# EAGLE board tsal (EAGLE 9.6.1)
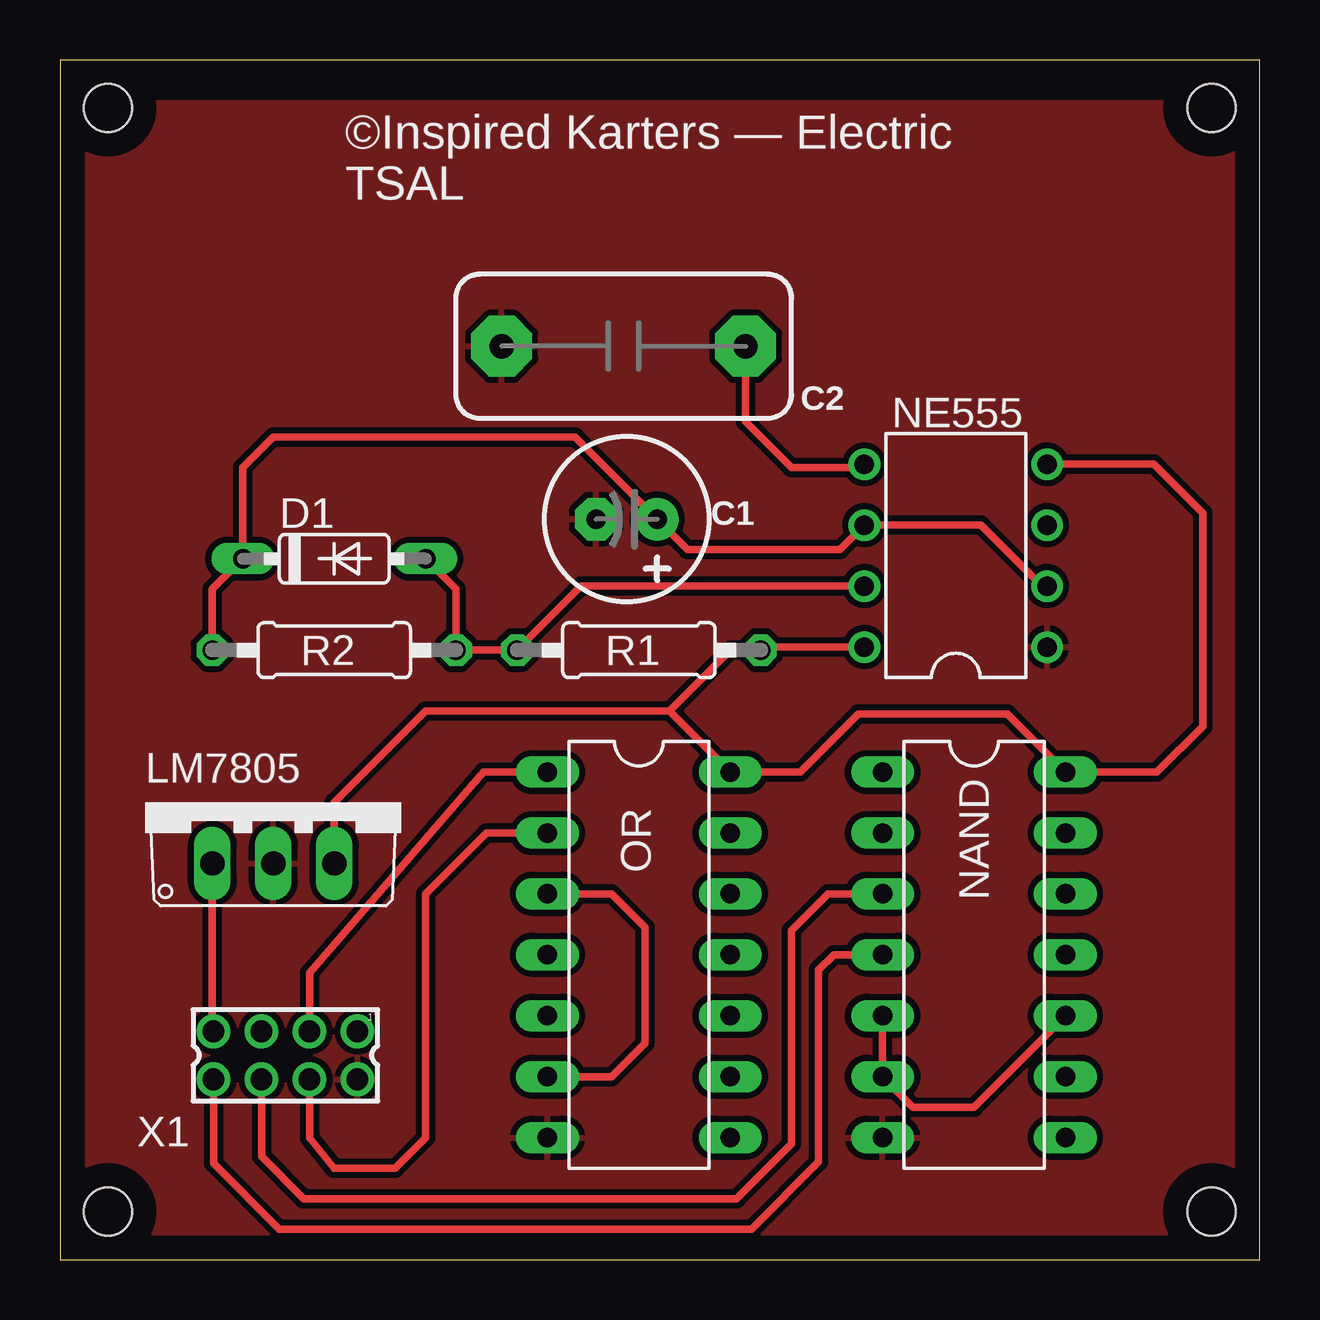
[diagram p0: board, top side]
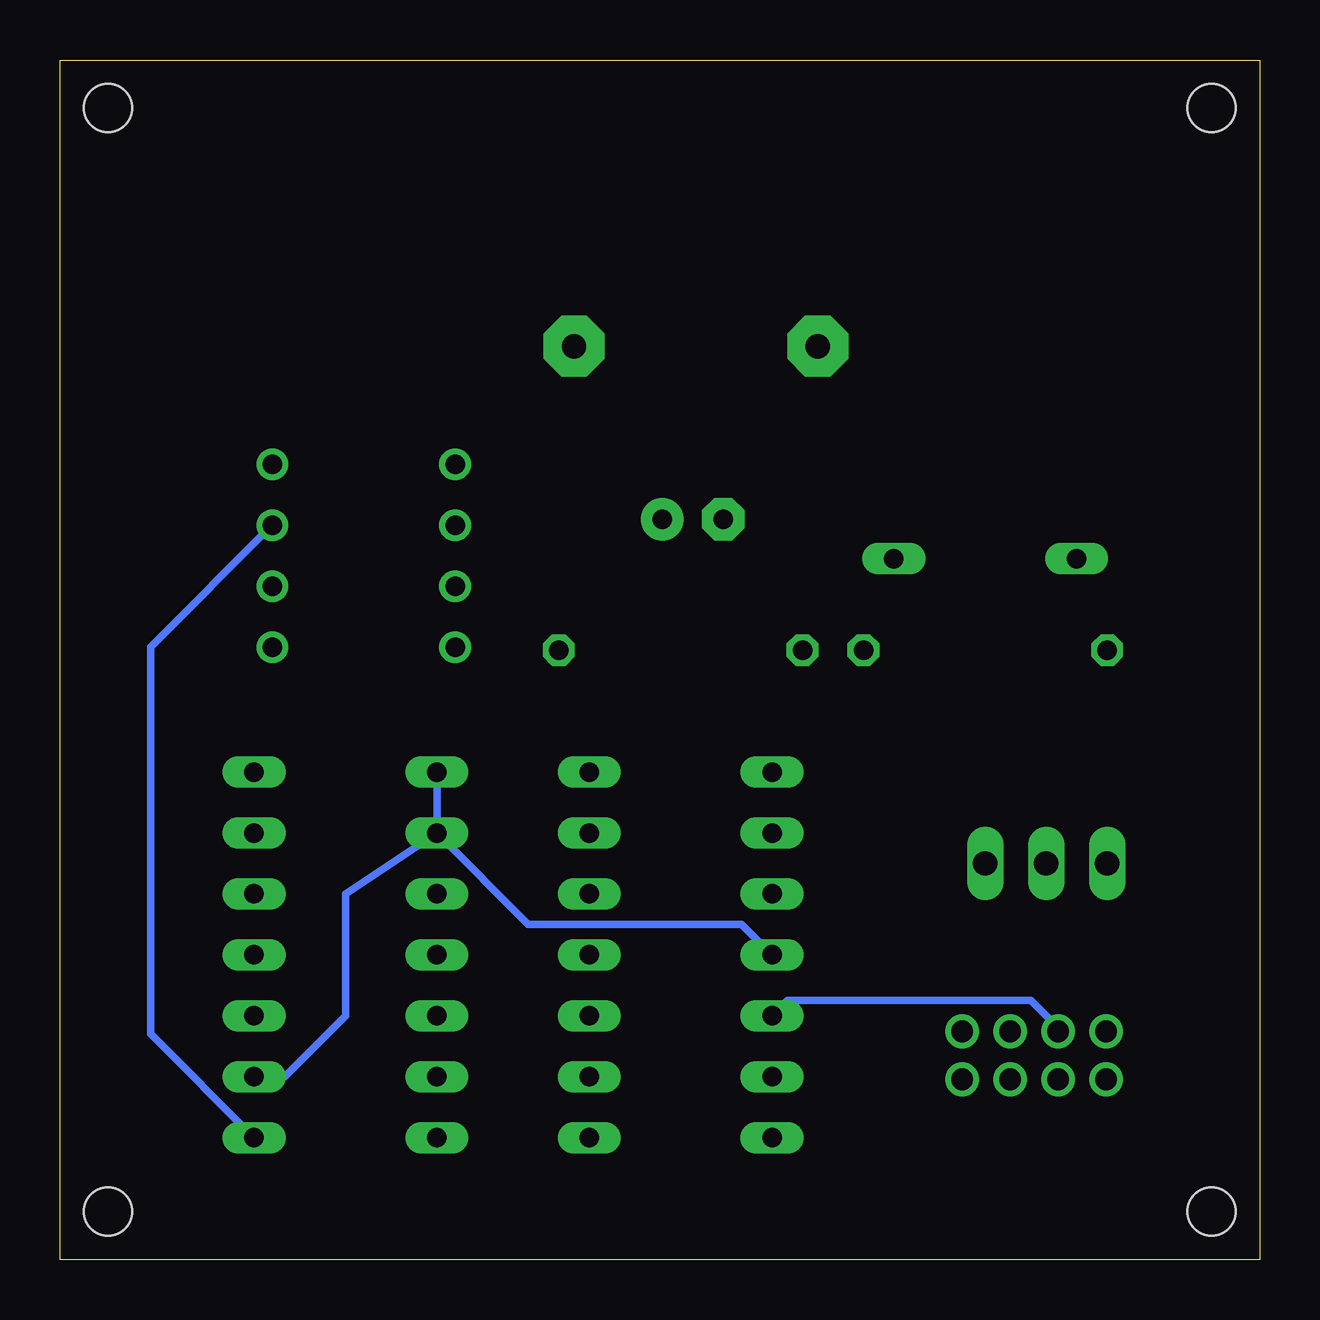
[diagram p1: board, bottom side, seen from below]

Size 50 x 50 mm. Coordinates in mm from the lower left corner, seen from the top.
Outline: 0,0 50,0 50,50 0,50 0,0
Copper layers (1*16): Top 0.035mm / dielectric 1.5mm / Bottom 0.035mm
Design rules "default": minimum track width 6mil, minimum drill 0.35mm, track to track 6mil, track to pad 6mil, pad to pad 6mil, via to via 6mil, smd to smd 6mil, copper to edge 40mil, drill to drill 6mil, minimum pad ring 10mil, minimum via ring 8mil, stop-mask expansion 4mil, vias tented up to drill 0mil, thermal gap 10mil
Net classes: 0 default: width 0.305 mm, drill 0.508 mm, clearance 0.254 mm
Holes 2 mm at 2,48 2,2 48,2 48,48

## Footprints (pad centres in the part's own frame; a part is rotated, then mirrored left to right if it is on the bottom)
CE-025X060 = drill 0.813 pad 1.778: + -1.27,0 | drill 0.813 pad 1.778 octagon: - 1.27,0
C100-140X060 = drill 1.016 pad 2.54 octagon: 1 -5.08,0; 2 5.08,0
DO35-7 = drill 0.813 long: A 3.81,0; C -3.81,0
TO220V = drill 1.016 long: 1 -2.54,-2.54; 2 0,-2.54; 3 2.54,-2.54
DIL14 = drill 0.813 long: 1 -7.62,-3.81; 2 -5.08,-3.81; 3 -2.54,-3.81; 4 0,-3.81; 5 2.54,-3.81; 6 5.08,-3.81; 7 7.62,-3.81; 8 7.62,3.81; 9 5.08,3.81; 10 2.54,3.81; 11 0,3.81; 12 -2.54,3.81; 13 -5.08,3.81; 14 -7.62,3.81
DIL08 = drill 0.813 pad 1.27: 1 -3.81,-3.81; 2 -1.27,-3.81; 3 1.27,-3.81; 4 3.81,-3.81; 5 3.81,3.81; 6 1.27,3.81; 7 -1.27,3.81; 8 -3.81,3.81
0207/10 = drill 0.813 octagon: 1 -5.08,0; 2 5.08,0
87758-0816 = drill 0.9 pad 1.27: 1 -3,-1; 2 -3,1; 3 -1,-1; 4 -1,1; 5 1,-1; 6 1,1; 7 3,-1; 8 3,1

## Placement (x,y rotation side)
C1  1µF  [CE-025X060]  23.62,30.86 180 top
C2  0.01µF  [C100-140X060]  23.5,38.07 180 top
D1  1N4148DO35-7  [DO35-7]  11.43,29.21 0 top
LM7805  7805TV  [TO220V]  8.89,19.05 0 top
NAND  4011N  [DIL14]  38.1,12.7 270 top
NE555  NE555N  [DIL08]  37.34,29.34 90 top
OR  4071N  [DIL14]  24.13,12.7 270 top
R1  220kΩ  [0207/10]  24.13,25.4 180 top
R2  220kΩ  [0207/10]  11.43,25.4 180 top
X1  87758-0816  [87758-0816]  9.4,8.51 180 top

## Library data of the parts
C1 C2 = rc-master
D1 = diode; SPICEPREFIX: D
LM7805 NE555 = linear
NAND = 40xx
OR = 40xx; SPICEPREFIX: X
R1 R2 = rcl; SPICEPREFIX: R
X1 = con-molex; MF: MOLEX; MPN: 87758-0816; OC_FARNELL: 7472331; OC_NEWARK: 59J1556; SPICEPREFIX: X

## Nets
GND: C1.- C2.2 LM7805.2 NAND.7 NE555.1 OR.7 X1.2
N$2: OR.1 X1.3
N$3: OR.2 X1.4
N$4: OR.3 OR.6
N$5: OR.5 X1.5
N$6: NAND.1 NAND.2 NAND.9 OR.4
N$7: NAND.3 X1.6
N$8: D1.A NE555.7 R1.2 R2.1
N$9: C1.+ D1.C NE555.2 NE555.6 R2.2
N$10: C2.1 NE555.5
N$11: NAND.5 NAND.6 NAND.10
N$12: NAND.4 X1.8
N$13: NAND.8 NE555.3
VCC: LM7805.1 X1.7
VO: LM7805.3 NAND.14 NE555.4 NE555.8 OR.14 R1.1

## Tracks (layer width: path | path; a pad name or v marks a point on that pad's centre or on a via)
GND
  pour Top: -1.27,46.99 -1.27,-1.27 59.69,-1.27 59.69,48.26 -1.27,48.26
N$2
  Top 0.305: X1.3 10.41,11.94 17.65,20.32 OR.1
N$3
  Top 0.305: X1.4 10.41,5.08 11.43,3.81 13.97,3.81 15.24,5.08 15.24,15.24 17.78,17.78 OR.2
N$4
  Top 0.305: OR.3 22.99,15.24 24.38,13.84 24.38,9.02 22.99,7.62 OR.6
N$5
  Bottom 0.305: OR.5 19.68,10.79 9.53,10.79 8.26,9.53 X1.5
N$6
  Bottom 0.305: NAND.9 40.64,7.62 38.1,10.16 38.1,15.24 NAND.2 | NAND.2 NAND.1 | NAND.2 30.48,13.97 21.59,13.97 OR.4
N$7
  Top 0.305: X1.6 8.4,4.3 10.16,2.54 28.19,2.54 30.48,4.83 30.48,13.72 32,15.24 NAND.3
N$8
  Top 0.305: D1.A 16.51,27.94 R2.1 R1.2 21.72,28.07 NE555.7
N$9
  Top 0.305: NE555.2 41.05,27.94 38.39,30.61 NE555.6 32.51,29.59 26.16,29.59 C1.+ 21.46,34.29 12.7,34.29 8.89,34.29 7.62,33.02 D1.C 6.35,27.94 R2.2
N$10
  Top 0.305: C2.1 28.57,34.92 30.48,33.02 33.4,33.02 NE555.5
N$11
  Top 0.305: NAND.5 NAND.6 35.56,6.35 38.1,6.35 NAND.10
N$12
  Top 0.305: X1.8 6.4,4.02 9.14,1.27 28.83,1.27 31.62,4.06 31.62,12.06 32.26,12.7 NAND.4
N$13
  Bottom 0.305: NAND.8 46.23,9.4 46.23,25.53 NE555.3
VCC
  Top 0.305: LM7805.1 6.35,9.56 X1.7
VO
  Top 0.305: LM7805.3 11.43,19.05 15.24,22.86 25.4,22.86 | 25.4,22.86 OR.14 30.86,20.32 33.27,22.73 38.1,22.73 39.5,22.73 NAND.14 45.72,20.32 47.62,22.23 47.62,31.11 45.59,33.15 NE555.4 | 25.4,22.86 27.94,25.4 R1.1 29.34,25.53 NE555.8

## Text on the board
tPlace: ©Inspired Karters — Electric / TSAL